# Altium PCB VFD_Clock.PcbDoc (part 1 of 2)
Units mil, origin at the board's own origin, x right, y up, seen from the top; angles counter-clockwise.
Board outline 9810.03 x 3515.03 mil, 2 copper layers (Top Layer, Bottom Layer); 86 components, 150 nets, 539 pads, 317 vias.
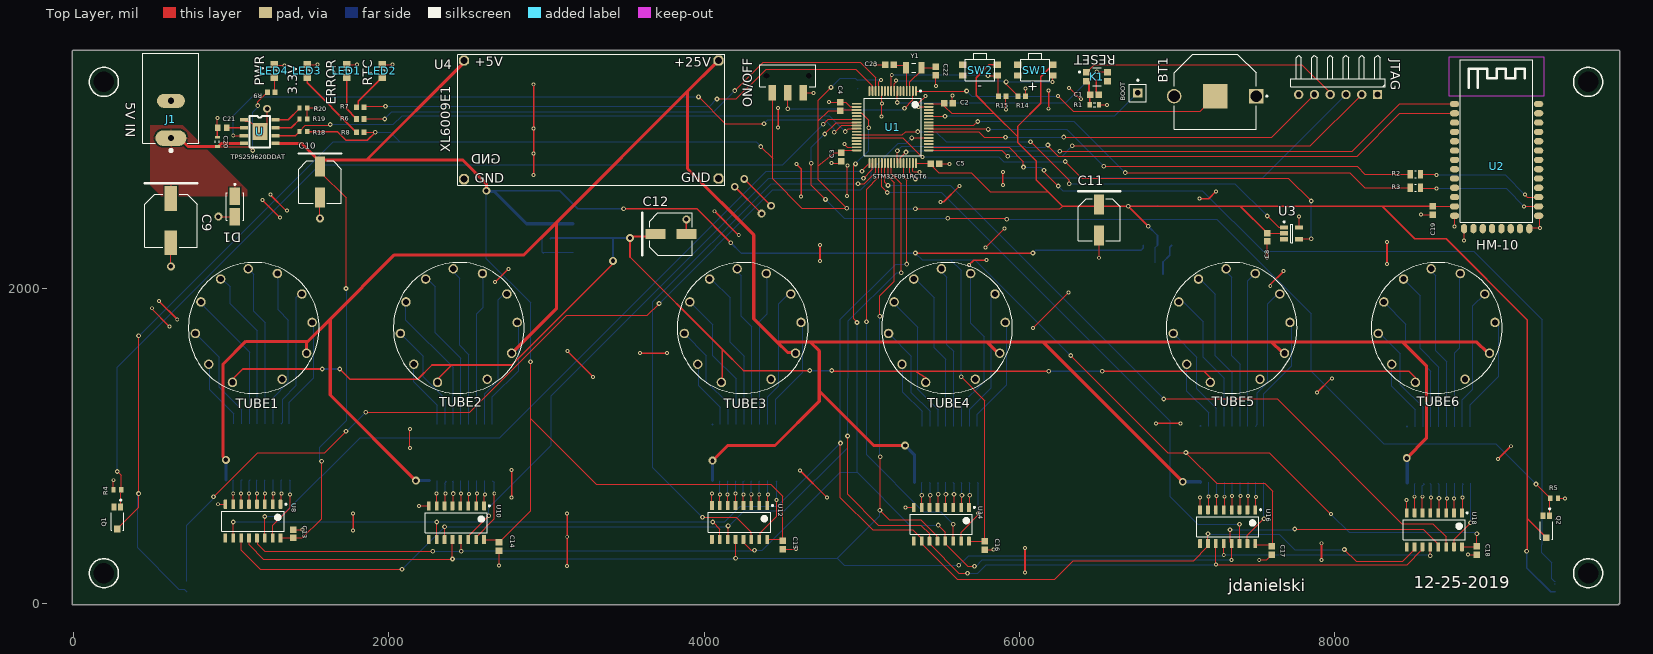
[diagram p0: Top Layer view]
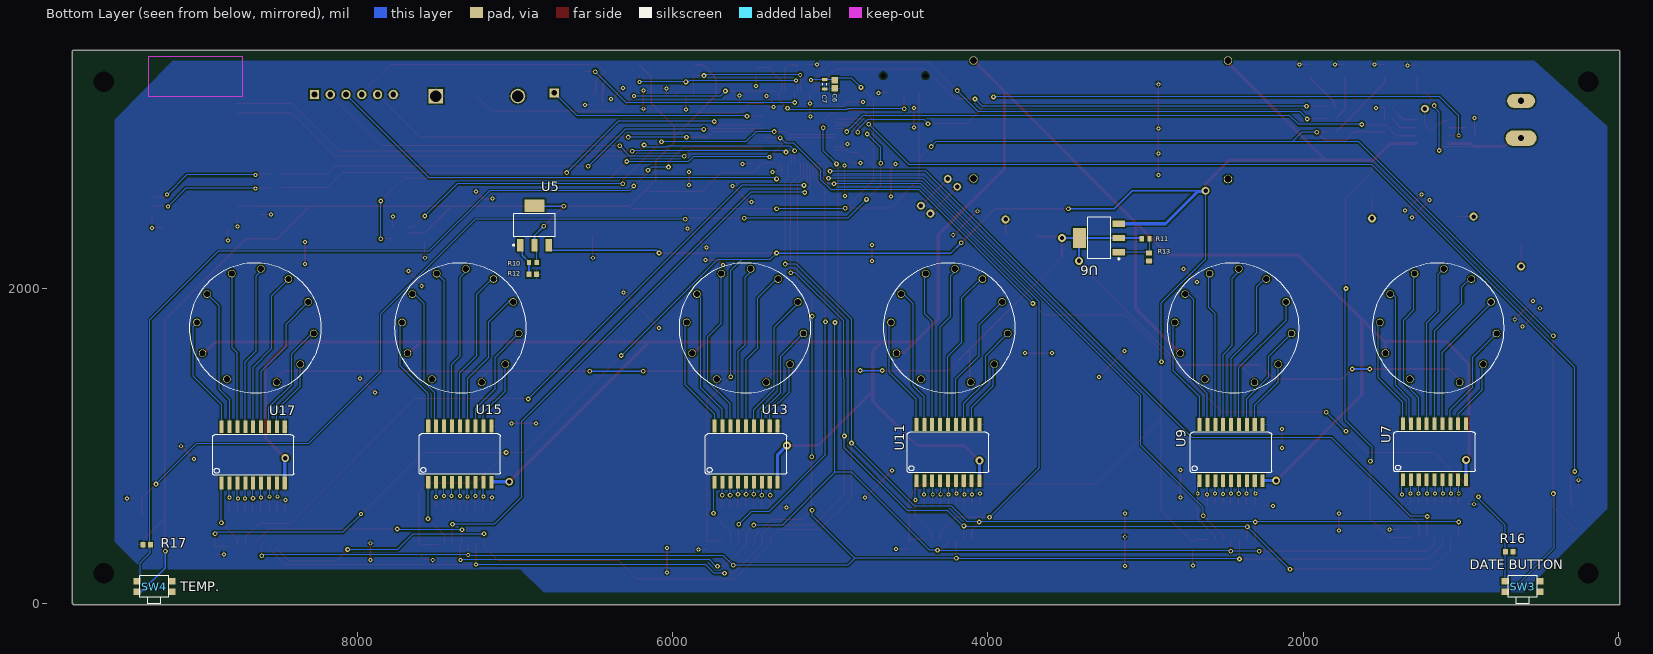
[diagram p1: Bottom Layer view, seen from below]

## Layer stack, top to bottom
Top Solder: solder mask 0.4, Solder Resist, Dk 3.5
Top Layer: signal copper 1.4
Dielectric 1: dielectric 12.6, FR-4, Dk 4.8
Bottom Layer: signal copper 1.4
Bottom Solder: solder mask 0.4, Solder Resist, Dk 3.5

## Board outline
0,-5.01 cw(c0,0) -5.01,0 -5.01,3505 cw(c0,3505) 0,3510.01 9800,3510.01 cw(c9800,3505) 9805.01,3505 9805.02,5 cw(c9800,5) 9800.02,-0.02 cw(c9795,0) 9795,-5.01

## Design rules (kind name [scope] priority, off if disabled: settings)
Clearance [All] p1: gap=10 ignorepadtopadclearanceinfootprint=TRUE except(0: Arc-Hole Track-Hole SMDPad-Hole THPad-Hole Via-Hole Fill-Hole Poly-Hole Region-Hole Text-Hole)
ComponentClearance [All] p1 off: gap=6 collisioncheckmode=3 verticalgap=10 showdistances=TRUE
HoleSize [All] p1: absolutevalues=TRUE maxlimit=1350 minlimit=1 maxpercent=80.000 minpercent=20.000
PolygonConnect [All] p1: connectstyle=Relief reliefconductorwidth=10 reliefentries=4 polygonreliefangle="90 Angle" airgapwidth=10
RoutingVias [All] p1: holewidth=28 width=50 viastyle="Through Hole" minholewidth=28 minwidth=50 maxholewidth=28 maxwidth=50
SilkToSilkClearance [All] p1 off: silktosilkclearance=10
SilkToSolderMaskClearance [IsPad] p1 off: minsilkscreentomaskgap=10 clearancetoexposedcopper=TRUE
SolderMaskExpansion [All] p1: expansion=4
Width [All] p1 off: maxlimit=10 minlimit=10 preferedwidth=10
26 further rules are at their usual default settings.

## Classes and differential pairs
component class Tubes4-6: C16 C17 C18 TUBE4 TUBE5 TUBE6 U13 U14 U15 U16 U17 U18
component class "Tubes 1-3": C13 C14 C15 TUBE1 TUBE2 TUBE3 U7 U8 U9 U10 U11 U12
component class Power: C9 C10 C11 C12 C20 C21 D1 J1 LED4 R9 R10 R11 R12 R13 R18 R19 R20 U U4 U5 U6
component class MCU: BOOT BT1 C1 C2 C3 C4 C5 C6 C7 C22 C23 JTAG K1 ON/OFF R1 R14 R15 R16 R17 SW1 SW2 SW3 SW4 U1 Y1
component class BLE_Sensors_LEDs: C8 C19 LED1 LED2 LED3 Q1 Q2 R2 R3 R4 R5 R6 R7 R8 U2 U3

## Components (designator, comment, footprint, x,y, rotation, side; value= is the part's Value field where it differs from the comment)
BOOT "Socket" PIN1 6750,3240 r0 top
BT1 "3001" KSTN-3001_V 7240,3220 r180 top
C1 "0.1uF" CAPC1608X90X40ML10T20 6475,3230 r180 top
C2 "100nF" CAPC1608X90X40ML10T20 5550,3175 r180 top
C3 "100nF" CAPC1608X90X40ML10T20 4870,2835 r90 top
C4 "100nF" CAPC1608X90X40ML10T20 4865,3155 r270 top
C5 "100nF" CAPC1608X90X40ML10T20 5465,2790 r180 top
C6 "10nF" CAPC1608X90X40ML10T20 4970,3295 r270 bottom
C7 "1uF" CAPC1608X90X20LL10 5035,3295 r90 bottom
C8 "0.1uF" CAPC1608X90X40ML10T20 7570,2325 r90 top
C9 "220uF" PNSC-FP-V-F_V 620,2430 r270 top
C10 "47uF" PNSC-FP-V-D_V 1565,2675 r270 top
C11 "47uF" PNSC-FP-V-D_V 6505,2435.39 r270 top
C12 "47uF" PNSC-FP-V-D_V 3790,2345.39 r0 top
C13 "0.1uF" CAPC1608X90X40ML10T20 1395,445 r270 top
C14 "0.1uF" CAPC1608X90X40ML10T20 2700,365 r90 top
C15 "0.1uF" CAPC1608X90X40ML10T20 4500,375 r90 top
C16 "0.1uF" CAPC1608X90X40ML10T20 5780,371.57 r90 top
C17 "0.1uF" CAPC1608X90X40ML10T20 7600,340 r90 top
C18 "0.1uF" CAPC1608X90X40ML10T20 8900,340 r90 top
C19 "0.1uF" CAPC1608X90X40ML10T20 8620,2495 r90 top
C20 "1uF" CAPC1608X90X20LL10 915,2930 r270 top
C21 "47nF" CAPC1608X90X35ML10T15 945,3020 r0 top
C22 "6pF" CAPC1608X90X40ML10T20 5470,3380 r90 top
C23 "6pF" CAPC1608X90X40ML10T20 5176.57,3420 r0 top
D1 "SMAJ5.0A-E3/61" VISH-DO-214AC-2_M 1025,2520 r270 top
J1 "5V IN" *CUI_PJ-037A 620,2953.78 r90 top
JTAG "Header 6H" HDR1X6H 8270,3230 r180 top
K1 "RESET" PNSC-EVPAA_V 6490.94,3343.54 r0 top
LED1 "ERROR" 0805_A 1735,3380 r270 top
LED2 "RTC" 0805_A 1960,3380 r270 top
LED3 "3.3V" 0805_A 1485,3380 r270 top
LED4 "PWR" 0805_A 1275,3380 r270 top
ON/OFF "JS102011SAQN" CKCP-JS102011SAQN-3_V 4530,3295 r180 top
Q1 "Left" VSIL-TEMT6000X01_V 280,545 r270 top
Q2 "Right" VSIL-TEMT6000X01_V 9340,490 r270 top
R1 "" J1-0603 6475,3165 r0 top value=10k
R2 "0" RESC2013X50X30LL20T20 8510,2725 r180 top
R3 "0" RESC2013X50X30LL20T20 8510,2640 r180 top
R4 "10k" RESC1608X55X30LL15T15 280,725 r0 top
R5 "10k" RESC1608X55X30LL15T15 9390,670 r180 top
R6 "1k" RESC1608X55X30LL20T20 1820,3075 r0 top
R7 "1k" RESC1608X55X30LL20T20 1820,3150 r0 top
R8 "1k" RESC1608X55X30LL20T20 1820,2990 r0 top
R9 "1k" RESC1608X55X30LL20T20 1255,3245 r180 top
R10 "300" RESC1608X55X30LL15T15 6885,2165 r180 bottom
R11 "10k" RESC1608X55X30LL15T15 3000,2315.39 r0 bottom
R12 "560" RESC1608X55X30LL20T20 6885,2090 r0 bottom
R13 "1.8k" RESC1609X50X30NL10T20 2980,2200 r270 bottom
R14 "10k" RESC1608X55X30LL20T20 6015,3220 r180 top
R15 "10k" RESC1608X55X30LL20T20 5890,3220 r180 top
R16 "10k" RESC1608X55X30LL20T20 695,330 r0 bottom
R17 "10k" RESC1608X55X30LL20T20 9334.06,376.46 r180 bottom
R18 "1K" RESC1608X55X30LL15T15 1460,2995 r0 top
R19 "464R" RESC1608X55X30LL15T15 1460,3075 r180 top
R20 "400K" RESC1608X55X30LL15T15 1460,3145 r180 top
SW1 "+" 434331045822 6100,3385 r180 top
SW2 "-" 434331045822 5750,3385 r180 top
SW3 "DATE BUTTON" 434331045822 610,110.77 r180 bottom
SW4 "TEMP." 434331045822 9285,110.77 r180 bottom
TUBE1 "VFD-IV-11" VFD-IV11 1145,1750 r0 top
TUBE2 "VFD-IV-11" VFD-IV11 2445,1750 r0 top
TUBE3 "VFD-IV-11" VFD-IV11 4245,1750 r0 top
TUBE4 "VFD-IV-11" VFD-IV11 5540,1750 r0 top
TUBE5 "VFD-IV-11" VFD-IV11 7345,1750 r0 top
TUBE6 "VFD-IV-11" VFD-IV11 8645,1750 r0 top
U "TPS259620DDAT" "TPS259620DDAT - duplicate" 1082.64,3069.8 r0 top
U1 "STM32F091RCT6" STM-LQFP64_L 5196.17,3023.83 r270 top
U2 "HM-10" HM-10 9025,2920 r0 top
U3 "TMP35" ADI-RJ-5_M 7725,2350 r0 top
U4 "XL6009E1" XL6009E1 3230,3055.39 r0 top
U5 "TLV1117LV33DCYR" DCY0004A_M 6875,2400 r90 bottom
U6 "TLV1117LV33DCYR" DCY0004A_M 3295,2320.39 r0 bottom
U7 "TBD62783AFG" TBD62783AFG 1215,965 r180 bottom
U8 "SN74HC595DR" D0016A_N 1140,525 r270 top
U9 "TBD62783AFG" TBD62783AFG 2505,960 r180 bottom
U10 "SN74HC595DR" D0016A_N 2430,515 r270 top
U11 "TBD62783AFG" TBD62783AFG 4300,960 r180 bottom
U12 "SN74HC595DR" D0016A_N 4225,517.28 r270 top
U13 "TBD62783AFG" TBD62783AFG 5580,950 r180 bottom
U14 "SN74HC595DR" D0016A_N 5505,505 r270 top
U15 "TBD62783AFG" TBD62783AFG 7395,950 r180 bottom
U16 "SN74HC595DR" D0016A_N 7320,490 r270 top
U17 "TBD62783AFG" TBD62783AFG 8705,945 r180 bottom
U18 "SN74HC595DR" D0016A_N 8630,470 r270 top
Y1 "ABS07-120-32.768KHZ-T" ABRA-ABS07_A_V 5330,3400 r180 top

## Footprints (in the part's own frame and the unit in brackets; to place one, negate y for a bottom-side part, rotate by r counter-clockwise, add the part's x,y. Pads: shape width x height; smd on the part's side, far side on the other; paste and mask are expansions set on the pad)
0805_A [mm] "Chip LED, 2-Leads, Body 2.0x1.3mm, IPC Medium Density"
  rect 1.1x1.2 smd: 1(-1.05,0) 2(1.05,0)
  silkscreen extent -0.15,-0.5 0.15,0.5, body extent -1,-0.62 1,0.63, height 0.68
434331045822 [mm] "4.7*3.5mm side push type,SMD, height 1.65mm, black actuator, 220gf, T&R"
  rect 1.2x1 smd: 1(2.8,0.85) 2(2.8,-0.85) 3(-2.8,0.85) 4(-2.8,-0.85)
  silkscreen extent -2.35,-2.75 2.35,1.75, body extent -3.2,-2.75 3.2,1.75, height 1.65
*CUI_PJ-037A [mm]
  oval 2.5x5 hole 1: 1(0,0)
  oval 2.25x4.5 hole 1: 2(6,0)
  silkscreen extent -2.2,-4.5 13.7,4.5
ABRA-ABS07_A_V [mm] "SMD, 2-Leads, Body 3.2x1.5mm"
  rect 1x1.8 smd: 1(-1.25,0) 2(1.25,0)
  silkscreen extent -0.35,-0.75 0.35,0.75, body extent -1.6,-0.75 1.6,0.75, height 0.9
ADI-RJ-5_M [mm] "SOT-23, 5-Leads, Body 2.9x1.6mm, Pitch 0.95mm, IPC Low Density"
  rect 1.3x0.7 smd: 1(-1.2,0.95) 2(-1.2,0) 3(-1.2,-0.95) 4(1.2,-0.95) 5(1.2,0.95)
  silkscreen extent -1.32,-1.5 0.15,1.97, body extent -0.85,-1.5 0.85,1.5, height 1.45
CAPC1608X90X20LL10 [mm] "Chip Capacitor, 2-Leads, Body 1.70x0.90mm, IPC High Density"
  rect 0.45x0.85 smd: 1(-0.75,0) 2(0.75,0)
  silkscreen extent -0.15,-0.33 0.15,0.33, body extent -0.85,-0.45 0.85,0.45, height 0.9
CAPC1608X90X35ML10T15 [mm] "Chip Capacitor, 2-Leads, Body 1.60x0.80mm, IPC Low Density"
  rect 0.95x1.05 smd: 1(-0.725,0) 2(0.725,0)
  body extent -0.85,-0.45 0.85,0.45, height 0.9
CAPC1608X90X40ML10T20 [mm] "Chip Capacitor, 2-Leads, Body 1.7x0.9mm, IPC Low Density"
  rect 1.05x1.05 smd: 1(-0.675,0) 2(0.675,0)
  body extent -0.85,-0.45 0.85,0.45, height 0.9
CKCP-JS102011SAQN-3_V [mm] "SMD, 3-Leads, Body 9x3.6mm, Pitch 2.5mm"
  rect 1.2x2.5 smd: 1(-2.5,1.375) 2(0,1.375) 3(2.5,1.375)
  round 0.6 hole 0.9 unplated: MH1(-3.4,-1.375) MH2(3.4,-1.375)
  silkscreen extent -4.5,-3.17 4.5,0.43, body extent -4.5,-5.18 4.5,2.37, height 3.52
D0016A_N [mm] "SOIC, 16-Leads, Body 10x4mm, Pitch 1.27mm, IPC Medium Density"
  rrect17% 1.45x0.6 smd: 1(-2.725,4.445) 2(-2.725,3.175) 3(-2.725,1.905) 4(-2.725,0.635) 5(-2.725,-0.635) 6(-2.725,-1.905) 7(-2.725,-3.175) 8(-2.725,-4.445) 9(2.725,-4.445) 10(2.725,-3.175) 11(2.725,-1.905) 12(2.725,-0.635) 13(2.725,0.635) 14(2.725,1.905) 15(2.725,3.175) 16(2.725,4.445)
  silkscreen extent -2.85,-5 1.6,5.42, body extent -3,-4.95 3,4.95, height 1.59
DCY0004A_M [mm] "SOT223, 4-Leads, Body 6.7x3.7mm, Pitch 2.3mm, IPC Low Density"
  rrect10% 2.05x1 smd: 1(-3.175,2.3) 2(-3.175,0) 3(-3.175,-2.3)
  rrect5% 2.05x3.25 smd: 4(3.175,0)
  silkscreen extent -3.3,-3.35 1.85,3.48, body extent -3.5,-3.25 3.5,3.25, height 1.62
HDR1X6H [mm] "Connector; Header; 6 Position; Right Angle"
  rect 1.5x1.5 hole 0.9: 1(0,0)
  round 1.5 hole 0.9: 2(2.54,0) 3(5.08,0) 4(7.62,0) 5(10.16,0) 6(12.7,0)
  silkscreen extent -1.27,-6.35 13.97,-1.27
HM-10 [mm]
  rrect99% 1.5x1 smd: 1(-6.77,6.35) 2(-6.77,4.85) 3(-6.77,3.35) 4(-6.77,1.85) 5(-6.77,0.35) 6(-6.77,-1.15) 7(-6.77,-2.65) 8(-6.77,-4.15) 9(-6.77,-5.65) 10(-6.77,-7.15) 11(-6.77,-8.65) 12(-6.77,-10.15) 13(-6.77,-11.65) 22(6.77,-11.65) 23(6.77,-10.15) 24(6.77,-8.65) 25(6.77,-7.15) 26(6.77,-5.65) 27(6.77,-4.15) 28(6.77,-2.65) 29(6.77,-1.15) 30(6.77,0.35) 31(6.77,1.85) 32(6.77,3.35) 33(6.77,4.85) 34(6.77,6.35)
  rrect99% 1x1.5 smd: 14(-5.23,-13.72) 15(-3.73,-13.72) 16(-2.23,-13.72) 17(-0.73,-13.72) 18(0.77,-13.72) 19(2.27,-13.72) 20(3.77,-13.72) 21(5.27,-13.72)
  Top Layer keep-out region: -7.62,7.62 -7.62,13.97 7.62,13.97 7.62,7.62
  Bottom Layer keep-out region: -7.62,7.62 -7.62,13.97 7.62,13.97 7.62,7.62
  silkscreen extent -5.84,-12.7 5.84,13.45
J1-0603 [mm] "Chip Resistor, Body 1.6x0.8mm, IPC High Density"
  rect 0.7x0.9 smd: 1(-0.75,0) 2(0.75,0)
  silkscreen extent -0.2,-0.35 0.2,0.35, body extent -0.85,-0.48 0.85,0.48, height 0.9
KSTN-3001_V [mm] "THD, 2-Leads, Body 13.21x12.07mm"
  rect 2.35x2.35 hole 1.85: 1(-6.605,0)
  round 2.35 hole 1.85: 2(6.605,0)
  rect 3.96x3.96 smd: 3(0,0)
  silkscreen extent -8.45,-6.73 6.61,5.34, body extent -6.61,-6.73 6.61,5.34, height 3
PIN1 [mm] "Connector; Plug"
  rect 1.5x1.5 hole 0.9: 1(0,0)
  silkscreen extent -1.4,-1.4 1.4,2.17
PNSC-EVPAA_V [mm] "SMD, 4-Leads, Body 2.9x3.5mm, Pitch 1.45mm"
  rect 1.15x1.05 smd: 1(-1.675,0.725) 2(-1.675,-0.725) 3(1.675,0.725) 4(1.675,-0.725)
  silkscreen extent -2.92,-1.45 0.7,1.45, body extent -1.75,-1.45 1.75,1.45, height 1.9
PNSC-FP-V-D_V [mm] "CAPAE, 2-Leads, Body 6.80x6.80mm"
  rect 3.2x1.6 smd: 1(-2.5,0) 2(2.5,0)
  silkscreen extent -4.6,-3.4 3.4,3.4, body extent -3.9,-3.4 3.9,3.4, height 6.1
PNSC-FP-V-F_V [mm] "CAPAE, 2-Leads, Body 8.50x8.50mm"
  rect 4x2 smd: 1(-3.55,0) 2(3.55,0)
  silkscreen extent -6.05,-4.25 4.25,4.25, body extent -5,-4.25 5,4.25, height 10.5
RESC1608X55X30LL15T15 [mm] "Chip Resistor, 2-Leads, Body 1.60x0.80mm, IPC High Density"
  rect 0.7x0.85 smd: 1(-0.625,0) 2(0.625,0)
  body extent -0.87,-0.48 0.87,0.48, height 0.55
RESC1608X55X30LL20T20 [mm] "Chip Resistor, 2-Leads, Body 1.60x0.80mm, IPC High Density"
  rect 0.8x0.9 smd: 1(-0.6,0) 2(0.6,0)
  body extent -0.9,-0.5 0.9,0.5, height 0.55
RESC1609X50X30NL10T20 [mm] "Chip Resistor, 2-Leads, Body 1.55x0.85mm, IPC Medium Density"
  rect 0.8x0.95 smd: 1(-0.625,0) 2(0.625,0)
  body extent -0.82,-0.48 0.82,0.48, height 0.5
RESC2013X50X30LL20T20 [mm] "Chip Resistor, 2-Leads, Body 2.00x1.25mm, IPC High Density"
  rect 0.85x1.35 smd: 1(-0.825,0) 2(0.825,0)
  silkscreen extent -0.1,-0.58 0.1,0.58, body extent -1.1,-0.72 1.1,0.72, height 0.5
STM-LQFP64_L [mm] "QFP, 64-Leads, Body 10x10mm, Pitch 0.5mm, IPC High Density"
  oval 1.6x0.3 smd: 1(-5.8,3.75) 2(-5.8,3.25) 3(-5.8,2.75) 4(-5.8,2.25) 5(-5.8,1.75) 6(-5.8,1.25) 7(-5.8,0.75) 8(-5.8,0.25) 9(-5.8,-0.25) 10(-5.8,-0.75) 11(-5.8,-1.25) 12(-5.8,-1.75) 13(-5.8,-2.25) 14(-5.8,-2.75) 15(-5.8,-3.25) 16(-5.8,-3.75) 33(5.8,-3.75) 34(5.8,-3.25) 35(5.8,-2.75) 36(5.8,-2.25) 37(5.8,-1.75) 38(5.8,-1.25) 39(5.8,-0.75) 40(5.8,-0.25) 41(5.8,0.25) 42(5.8,0.75) 43(5.8,1.25) 44(5.8,1.75) 45(5.8,2.25) 46(5.8,2.75) 47(5.8,3.25) 48(5.8,3.75)
  oval 0.3x1.6 smd: 17(-3.75,-5.8) 18(-3.25,-5.8) 19(-2.75,-5.8) 20(-2.25,-5.8) 21(-1.75,-5.8) 22(-1.25,-5.8) 23(-0.75,-5.8) 24(-0.25,-5.8) 25(0.25,-5.8) 26(0.75,-5.8) 27(1.25,-5.8) 28(1.75,-5.8) 29(2.25,-5.8) 30(2.75,-5.8) 31(3.25,-5.8) 32(3.75,-5.8) 49(3.75,5.8) 50(3.25,5.8) 51(2.75,5.8) 52(2.25,5.8) 53(1.75,5.8) 54(1.25,5.8) 55(0.75,5.8) 56(0.25,5.8) 57(-0.25,5.8) 58(-0.75,5.8) 59(-1.25,5.8) 60(-1.75,5.8) 61(-2.25,5.8) 62(-2.75,5.8) 63(-3.25,5.8) 64(-3.75,5.8)
  silkscreen extent -5.92,-4.6 4.6,4.6, body extent -5,-5 5,5, height 1.6
TBD62783AFG [mil]
  rect 26x80 smd: GND(246.46,178.15) I1(-153.54,-178.15) I2(-103.35,-178.15) I3(-53.54,-178.15) I4(-3.54,-178.15) I5(46.46,-178.15) I6(96.46,-178.15) I7(146.46,-178.15) I8(196.46,-178.15) O1(-153.54,178.15) O2(-103.54,178.15) O3(-53.54,178.15) O4(-3.54,178.15) O5(46.46,178.15) O6(96.46,178.15) O7(146.46,178.15) O8(196.46,178.15) VCC(246.46,-178.15)
  silkscreen extent -211,-128 304,128
"TPS259620DDAT - duplicate" [mm]
  rect 1.3x0.55 smd: 1(0,0) 2(0,-1.27) 4(0,-3.81) 5(5.1,-3.81) 6(5.1,-2.54) 7(5.1,-1.27) 8(5.1,0)
  rect 1.4x0.55 smd: 3(0,-2.54)
  rect 2.4x2.7 smd: 9(2.6,-1.9)
  silkscreen extent 0.9,-4.44 4.2,0.64
VFD-IV11 [mil]
  round 60 / inner round 60 / far side round 47.56 hole 40: 1(180,-325) 2(335,-160) 3(370,35) 4(305,215) 5(150,345) 6(-35,375) 7(-210,310) 8(-335,165) 9(-370,-35) 10(-285,-230) 11(-135,-345)
  silkscreen extent -415,-415 415,415
VISH-DO-214AC-2_M [mm] "DO-214AC, 2-Leads, Body 4.5x2.79mm, IPC Low Density"
  rect 2.8x1.7 smd: 1(-1.625,0) 2(1.625,0)
  silkscreen extent -3.7,-1.4 2.25,1.4, body extent -2.25,-1.39 2.25,1.4, height 2.29
VSIL-TEMT6000X01_V [mm] "SMD, 3-Leads, Body 4x2mm"
  rect 1.1x0.8 smd: 1(-1.775,0.55) 2(-1.775,-0.55)
  rect 1.1x1 smd: 3(1.775,0)
  silkscreen extent -3,-1 2,1, body extent -2,-1 2,1, height 1.05
XL6009E1 [mil]
  oct 65x65 / inner oct 60x60 / far side oct 50x50 hole 45: P$1(-751.97,389.76) P$2(862.2,389.76) P$3(862.2,-358.27) P$4(-751.97,-362.2)
  silkscreen extent -791,-400 902,430

## Part data
BT1: library part CMP-2000-05463-1, "Holder Battery Coin, 12 mm, 2-Pin THD, RoHS", Manufacturer=Keystone, Package Description="2-Pin Through Hole Device, Body 13.21 x 12.07 mm", Datasheet URL=https://datasheet.ciiva.com/3/3001-3954.pdf, Datasheet Version="Rev. H, 09/2006", Manufacturer URL=http://www.keyelco.com/, Mounting Technology=ThroughHole, Package Reference=3001
C1 C2 C3 C4 C5 C8 C13 C14 C15 C16 C17 C18 C19 C22 C23: library part CMP-2000-05002-1, "Ceramic Multilayer Capacitor, 100 nF, +/- 10%, 50 V, -55 to 155 degC, 0603 (1608 Metric), RoHS, Tape and Reel", Capacitance=0.1µF, Manufacturer=Yageo, Operating Temperature=-55degC~125degC, Package / Case=0603(1608Metric), Package Description="2-Pin Surface Mount Device, Body 1.6 x 0.8 mm", Package Reference=603, Ratings=-, Standard Package=1, Temperature Coefficient=X7R, Tolerance=±10%, Voltage - Rated=16V, Applications=GeneralPurpose, Category=Capacitors, Datasheet URL=https://datasheet.ciiva.com/11786/0900766b80d84f1d-11786077.pdf, Datasheet Version="Rev. 2, 05/2009", Family=CeramicCapacitors, Featured Product=CommodityMultilayerCeramicCapacitors–CCSeries, Features=-, Height - Seated (Max)=-, Lead Spacing=-, Lead Style=-, Manufacturer URL=http://www.yageo.com/, Mounting Type=SurfaceMount,MLCC, Online Catalog=CCSeries, Other Names=311-1088-6, Packaging=Digi-Reel, Product Training Modules=MultilayerCeramicCapacitors, Series=CC, Size / Dimension="0.063\"Lx0.031\"W(1.60mmx0.80mm)", Thickness (Max)="0.035\"(0.90mm)"
C6: library part CMP-2100-03600-1, "Chip Capacitor, 10 nF, +/- 10%, 50 V, -55 to 125 degC, 0603 (1608 Metric), RoHS, Tape and Reel", Case/Package=0603, Case Code (Metric)=1608, Dielectric=X7R, Insulation Resistance=100GR, Manufacturer=Yageo, Max Operating Temperature=125degC, Min Operating Temperature=-55degC, Package Description="2-Pin Surface Mount Device, Body 1.6 x 0.8 mm", Package Quantity=1, Tolerance=10%, Voltage=50V, Capacitance=10nF, Case Code (Imperial)=0603, Composition=Ceramic, Datasheet URL=http://www.yageo.com/documents/recent/UPY-GPHC_X7R_6.3V-to-50V_15.pdf, Datasheet Version="Rev. 15, 10/2016", Depth=0.8mm, Height=0.8mm, Lead Free=LeadFree, Length=1.6mm, Manufacturer URL=http://www.yageo.com/, Material=Ceramic, Mount=SurfaceMount, Number of Pins=2, Package Reference=0603, Packaging=TapeandReel, Radiation Hardening=No, REACH SVHC=NoSVHC, RoHSCompliant=True, Termination=SMD/SMT, Thickness=0.035inch, Voltage Rating=50V, Voltage Rating (DC)=50V, Width=0.031inch
C7 C20: library part CMP-2000-06025-1, "Chip Capacitor, 1 uF, +/- 10%, 50 V, -55 to 85 degC, 0603 (1608 Metric), RoHS, Tape and Reel", Capacitance=1µF, Manufacturer=TDK, Operating Temperature=-55°C~85°C, Package / Case=0603(1608Metric), Package Description="2-Pin Surface Mount Device, Body 1.6 x 0.8 mm", Package Reference=0603, PCN Part Number=MLCCPartNumberChange30/Nov/2012, Ratings=-, Standard Package=1, Temperature Coefficient=X5R, Tolerance=±10%, Voltage - Rated=50V, Applications=GeneralPurpose, Category=Capacitors, Datasheet URL=https://product.tdk.com/info/en/catalog/datasheets/mlcc_commercial_general_en.pdf, Datasheet Version=08/2016, Design Resources=20WNon-IsolatedBuckLEDDriverUsingPLLNK460KG, Family=CeramicCapacitors, Features=-, Height - Seated (Max)=-, Lead Spacing=-, Lead Style=-, Manufacturer URL=http://www.tdk.com/, Mounting Technology=SurfaceMount, Mounting Type=SurfaceMount,MLCC, Online Catalog=CSeries,GeneralPurpose, Other Names=445-7468-6, Packaging=Digi-Reel®, Product Training Modules=CSeriesGeneralApplicationsSEAT,CCV,andTVCLDesignToolsGuidetoReplacinganElectrolyticCapacitorwithanMLCC, RoHS Information=RoHSCertificate-MLCC, Series=C, Size / Dimension="0.063\"Lx0.031\"W(1.60mmx0.80mm)", Thickness (Max)="0.035\"(0.90mm)"
C9: library part CMP-2000-06215-1, "Aluminum Electrolytic Capacitor, 220 uF, +/- 20%, 35 V, 2-Pin SMD (Size Code F), -55 to 105 degC, RoHS, Tape and Reel", AE Capacitor Case=RadialCan-SMD, Capacitance=220µF, Capacitance Tolerance=±20%, Leakage Current=7.7µA, Life Time @ Temperature=2000hours@105°C, Manufacturer=Panasonic, Operating Temperature Max=105°C, Operating Temperature Min=-55°C, Operating Temperature Range=-55°Cto+105°C, Package Description="2-Pin Electrolytic Aluminum Capacitor, Body 8.3 x 8.3 mm", Package Reference=FP-V-F, Ripple Current AC=850mA, Voltage Rating=35V, Capacitance Tolerance ±=±20%, Capacitor Case Style=RadialCan-SMD, Datasheet URL=http://industrial.panasonic.com/cdbs/www-data/pdf/RDE0000/ABA0000C1184.pdf, Datasheet Version=03/2016, Diameter=8mm, ESR=0.08ohm, External Length / Height=10.2mm, Height=10.2mm, Lifetime @ Temperature=2000hours@105°C, Manufacturer URL=http://www.panasonic.com/, Mounting Technology=SurfaceMount, Package URL=http://industrial.panasonic.com/cdbs/www-data/pdf/RDE0000/DME0000COL48.pdf, Packaging=CutTape, Product Range=PANASONIC-FPSeries, Series=FP, SVHC=ToBeAdvised
C10 C11 C12: library part CMP-2000-06216-1, "Aluminum Electrolytic Capacitor, 47 uF, +/- 20%, 35 V, 2-Pin SMD (Size Code D), -55 to 105 degC, RoHS, Tape and Reel", Capacitance=47µF, Case Size/Dimension=Ø6.3x5.8mm, ESR (Equivalent Series Resistance)=0.26O, Lifetime@Temperature=2000Hrs@105°C, Manufacturer=Panasonic, Operating Temp-Max=105°C, Operating Temp Range=-55to+105°C, Package Description="2-Pin Electrolytic Aluminum Capacitor, Body 6.6 x 6.6 mm", Package Reference=FP-V-D, Rated Voltage=35V, Ripple Current=300mA, Datasheet URL=http://industrial.panasonic.com/cdbs/www-data/pdf/RDE0000/ABA0000C1184.pdf, Datasheet Version=03/2016, Manufacturer URL=http://www.panasonic.com/, Mounting Technology=SurfaceMount, Package URL=http://industrial.panasonic.com/cdbs/www-data/pdf/RDE0000/DME0000COL48.pdf, Series=FP, Type=Can
C21: library part CMP-2006-02927-1, Manufacturer=Murata, Part Number=GRM188R71H473KA61D
D1: library part CMP-0548-00235-2, "Transient Voltage Suppressor, 6.40 to 231 V, 5 V Stand-off Voltage, Uni-Directional, -55 to 155 degC, 2-pin DO-214AC, Pb-Free, Tape and Reel", Manufacturer="Vishay Semiconductor", Operating Junction and Storage Temperature Range="-55 to 150 degC", ComponentLink1Description="Manufacturer URL", ComponentLink1URL=http://www.vishay.com/, ComponentLink2Description=Datasheet, ComponentLink2URL=http://www.vishay.com/docs/88390/smaj50a.pdf, ComponentLink3Description="Package Specification", ComponentLink3URL=http://www.vishay.com/docs/88390/smaj50a.pdf, DatasheetVersion=12/8/2013, ID (uA)=800, IFSM="40 A", Mounting Technology="Surface Mount", PackageDescription="2-Pin DO-214AC (SMA), Body 4.245 x 2.665 mm", PackageReference=DO-214AC-2, Packing="Tape and Reel", PartNumber=SMAJ5.0A-E3/61, PPPM (W)="400, 300", RoHS=TRUE, VBR Uni-Directional (V)="6.4 to 231", VWM (V)=5
J1: library part PJ-037A
JTAG: "Header, 6-Pin, Right Angle", LatestRevisionDate=17-Jul-2002, LatestRevisionNote="Re-released for DXP Platform.", Publisher="Altium Limited"
K1: library part CMP-2000-06231-1, "Light Touch Switch, 100 mOhm, -40 to 85 degC, 4-Pin SMD, RoHS, Tape and Reel", Actuator Color=Black, Contact Rating @ Voltage=0.02@15VDCA, Dielectric Strength=250VAC, Manufacturer=Panasonic, Maximum AC Voltage Rating=N/A, Maximum Contact Resistance=100mOhm, Maximum DC Voltage Rating=15V, Minimum Insulation Resistance=100MOhm, Operating Force=1N, Operating Temperature=-40to85C, Package Description="4-Pin Surface Mount Device, Body 2.9 x 3.5 mm, Pitch 1.45 mm", Package Reference=EVPAA, Part No=EVP-AA002K, Actuator Length=0.3mm, Actuator Style=RectangularButton, Base Material=N/A, Body Orientation=Straight, Contact Material=N/A, Contact Plating=N/A, COO=JP, Datasheet URL=https://industrial.panasonic.com/cdbs/www-data/pdf/ATV0000/ATV0000C1.pdf, Datasheet Version=04/2016, Dimension=4.3x2.9x1.7mm, ECCN=EAR99, Electrical Life=1000000Cycles, Family=EVPAA, Ground Terminal=No, Housing Material=N/A, HTS=8507204000, Illumination Type=N/R, Manufacturer URL=http://www.panasonic.com/, Mechanical Life=N/A, Mounting=SurfaceMount,J-Bend, Mounting Technology=SurfaceMount, Packaging=EmbossedTapeandReel, Pole Throw Configuration=SPST, Product Weight=N/A, RoHS=Yes, Seal Description=N/A, Seal Location=N/A, Supplier=PanasonicIndustrialDevices, Supplier Standard Pack=5,000, Switch Configuration=N.O., Type=LightTouch
LED1 LED2 LED3 LED4: library part CMP-1426-00010-1, "SMD mono-color Chip LED, WL-SMCW, Super Red", Color="Super Red", Manufacturer="Wuerth Elektronik", PartNumber=150080SS75000, ComponentLink1Description="Manufacturer URL", ComponentLink1URL=http://www.we-online.com, ComponentLink2Description=Datasheet, ComponentLink2URL=http://katalog.we-online.com/led/datasheet/150080SS75000.pdf, PackageReference=0805_A
ON/OFF: library part CMP-2000-06501-1, "Sub-Miniature Slide Switch, SPDT, -40 to 85 degC, 3-Pin SMD, RoHS, Tape and Reel", Actuator Color=Black, Contact Rating @ Voltage=0.3@6VDCA, Dielectric Strength=500VAC, Manufacturer="C&K Components", Maximum AC Voltage Rating=N/A, Maximum Contact Resistance=70mOhm, Maximum DC Voltage Rating=6V, Minimum Insulation Resistance=100MOhm, Operating Temperature=-40to85C, Package Description="3-Pin Surface Mount Device, Body 9 x 3.6 mm, Height 3.5 mm", Package Reference=SMT, Actuator Material=Nylon4/6, Actuator Style=SideSlide, Base Material=N/A, Body Orientation=RightAngle, Contact Material=CopperAlloy, Contact Plating=Silver, COO=US, Datasheet URL=https://datasheet.ciiva.com/1532/js-9dec14-1532400.pdf, Datasheet Version=12/2014, Dimension=9x4.3mm, ECCN=EAR99, Electrical Life=15000Cycles, Family=JS, Housing Material=Nylon4/6, HTS=8536509050, Manufacturer URL=http://www.ckswitches.com/, Mechanical Life=N/A, Mounting=SurfaceMount,GullWing, Mounting Technology=SurfaceMount, Packaging=TapeandReel, Part No=JS102011SAQN, Pole Throw Configuration=SPDT, Product Weight=N/A, RoHS=Yes, Seal Description=N/A, Seal Location=N/A, Supplier=C&KComponents, Switch Configuration=N/A, Type=Sub-Miniature
Q1 Q2: library part CMP-1666-00035-1, "Ambient Light Sensor / , 100 mW, -40 to 100 degC, 3-Pin SMD, RoHS, Tape and Reel", Case\Package=0603, Case Code (Metric)=1608, Colour=Red, Forward Current="20 mA", Forward Voltage="2 V", Max Operating Temperature="85 degC", Min Operating Temperature="-55 degC", Package Quantity=3000, Power Rating="75 mW", Case Code (Imperial)=0603, ComponentLink1Description="Manufacturer URL", ComponentLink1URL=http://www.vishay.com/, ComponentLink2Description=Datasheet, ComponentLink2URL=http://www.vishay.com/docs/81579/temt6000.pdf, DatasheetVersion="Rev. 1.9, 08/2011", Height="0.8 mm", Illumination Colour=Red, Length="1.6 mm", Lens Style=Diffused, Luminous Intensity="54 mcd", Mount="Surface Mount", Nominal Vf="2 V", PackageDescription="3-Pin Surface Mount Device, Body 4 x 2 mm", PackageReference=1206, Packaging="Tape and Reel", Pins=2, Radiation Hardening=No, RoHSCompliant=true, Viewing Angle="130 degrees", Width="0.8 mm"
R1: library part Res3, "Resistor", LatestRevisionDate=29-May-2009, LatestRevisionNote="IPC-7351 Footprint Added.", PackageDescription="Chip Resistor", PackageReference=J1-0603, Published=8-Jun-2000, Publisher="Altium Limited"
R2 R3: library part CMP-2001-04896-1, Manufacturer="Vishay Dale", Part Number=CRCW08050000Z0EA
R4 R5: library part CMP-2000-00181-1, Manufacturer=Panasonic, Part Number=ERJ-3EKF1002V
R6 R7 R8 R9 R14 R15 R16 R17: library part CMP-2000-00873-1, Manufacturer=Panasonic, Part Number=ERA3AEB102V
R10 R11 R18 R19 R20: library part CMP-2000-00411-1, Manufacturer=Panasonic, Part Number=ERJ-3EKF3000V
R12: library part CMP-2000-00091-1, Manufacturer=Panasonic, Part Number=ERA3AEB561V
R13: library part CMP-2000-03824-1, Manufacturer="Vishay Dale", Part Number=CRCW0603100RFKEA
SW1 SW2 SW3 SW4: library part CMP-1461-00001-1, "WS-TASU SMD Tact Switch 4.7X3.5 mm side push", Manufacturer="Wuerth Elektronik", PartNumber=434331045822, ComponentLink1Description="Manufacturer URL", ComponentLink1URL=http://www.we-online.com, ComponentLink2Description=Datasheet, ComponentLink2URL=http://katalog.we-online.de/em/datasheet/434331045822.pdf, NoPins=04, PackageReference=434331045822
TUBE1 TUBE2 TUBE3 TUBE4 TUBE5 TUBE6: Package=VFD-IV11, DeviceSetName=VFD-IV-11, GateName_1=G$1, LibraryName=VFD-Clock, SymbolName_1=VFD-IV11
U: library part TI_TPS259620DDAT, "Texas Instruments TPS259620DDAT", ComponentLink1Description="TI Link", ComponentLink1URL=http://www.ti.com/product/TPS2596
U1: library part CMP-0304-00199-2, "ARM Cortex-M0 32-bit MCU, 256 KB Flash, 32 KB Internal RAM, 52 I/Os, 64-Pin LQFP, -40 to 85 degC, Tray", I/Os (High Current)=52, Manufacturer=STMicroelectronics, Operating Frequency(F) (Processor speed) (MHz)=48, Package Description="64-Pin Low-profile Quad Flat Package, Body 10 x 10 mm, Pitch 0.5 mm", Package Reference=LQFP64, Supply Voltage(Vcc) min (V)=2, ComponentLink1Description="Manufacturer URL", ComponentLink1URL=http://www.st.com/, ComponentLink2Description=Datasheet, ComponentLink2URL=http://www.st.com/st-web-ui/static/active/en/resource/technical/document/datasheet/DM00115237.pdf, Core="ARM Cortex-M0", D/A Converter=1, DatasheetVersion="Rev. 2", FLASH Size (Prog) (kB)=256, Internal RAM Size (kB)=32, Mounting Technology="Surface Mount", Packing=Tray, PartNumber=STM32F091RCT6
U3: library part CMP-0887-00046-1, "Voltage Output Temperature Sensor, 2.7 to 5.5 V Supply, Industrial, 5-pin SOT23 (RJ-5), Reel", Manufacturer="Analog Devices", PartNumber=TMP35GRTZ-REEL7, Supply Voltage Range="2.7 to 5.5 V", Code_JEDEC=MO-178-AA, ComponentLink1Description="Manufacturer URL", ComponentLink1URL=http://www.analog.com/en/index.html, ComponentLink2Description=Datasheet, ComponentLink2URL=http://www.analog.com/static/imported-files/data_sheets/TMP35_36_37.pdf, ComponentLink3Description="Package Specification", ComponentLink3URL=http://www.analog.com/static/imported-files/packages/PKG_PDF/SOT-23(RJ)/RJ_5.pdf, ComponentLink4Description="Product URL", ComponentLink4URL=http://www.analog.com/en/mems-sensors/digital-temperature-sensors/tmp35/products/product.html, DatasheetVersion="Rev. F", Mounting Technology="Surface Mount", PackageDescription="5-Pin Small Outline Transistor Package, Body 2.9 x 1.6 mm, Pitch 0.95 mm", PackageReference=RJ-5, PackageVersion="121608-A , 12/2008", Packing=Reel
U5 U6: library part CMP-0395-00503-2, "Single Output LDO, 1 A, Fixed 3.3 V Output, 2 to 5.5 V Input, 4-pin SOT-223 (DCY), -40 to 125 degC, Green (RoHS & no Sb/Br)", Manufacturer="Texas Instruments", Accuracy(%)=2, Code_JEDEC=TO-261, ComponentLink1Description="Manufacturer URL", ComponentLink1URL=http://www.ti.com/, ComponentLink2Description=Datasheet, ComponentLink2URL=http://www.ti.com/general/docs/lit/getliterature.tsp?genericPartNumber=TLV1117LV33&fileType=pdf, ComponentLink3Description="Package Specification", ComponentLink3URL=http://www.ti.com/litv/pdf/mpds094a, DatasheetVersion=SBVS160A, Eco-Plan="Green (RoHS & no Sb/Br)", Fixed Output Options(V)=3.3, Iout(Max)(A)=1, Iq(Typ)(mA)=0.05, Mounting Technology="Surface Mount", PackageDescription="4-Pin Plastic Small Outline, Body 3.5 x 6.5 mm, Pitch 2.3 mm", PackageReference=DCY0004A, PackageVersion=4202506/B, PartNumber=TLV1117LV33DCYR, SubFamily="Single Channel LDO", Vdo(Typ)(mV)=1200, Vin(Max)(V)=5.5, Vin(Min)(V)=2, Vout Adj(Max)(V)=3.3, Vout Adj(Min)(V)=3.3
U7: "TUBE1", DeviceSetName=TBD62783AFG, GateName_1=G$1, LibraryName=TBD62783AFG, Package=TBD62783AFG, SymbolName_1=TBD62783AFG
U8 U10 U12 U14 U16 U18: library part CMP-0780-00037-3, "8-Bit Shift Registers With 3-State Output Registers, D0016A, LARGE T&R", F @ Nom Voltage(Max)(Mhz)=28, Generic Part Number=SN74HC595, ICC @ Nom Voltage(Max)(mA)=0.08, Manufacturer="Texas Instruments", Operating Temperature Range(C)="-40 to 85", Rating=Military, tpd @ Nom Voltage(Max)(ns)=34, Voltage(Nom)(V)=6, 3-State Output=Yes, Bits=4, Code_JEDEC="MS-012 variation AC", DatasheetVersion=SCLS041H, Input Type=CMOS, Output Drive (IOL/IOH)(Max)(mA)=7.8/-7.8, Output Type=CMOS, PackageReference=D0016A, PackageVersion=http://www.ti.com/lit/ml/mpds178g/mpds178g.pdf, Technology Family=HC, VCC(Max)(V)=6, VCC(Min)(V)=2
U9: "TUBE2", DeviceSetName=TBD62783AFG, GateName_1=G$1, LibraryName=TBD62783AFG, Package=TBD62783AFG, SymbolName_1=TBD62783AFG
U11: "TUBE3", DeviceSetName=TBD62783AFG, GateName_1=G$1, LibraryName=TBD62783AFG, Package=TBD62783AFG, SymbolName_1=TBD62783AFG
U13: "TUBE4", DeviceSetName=TBD62783AFG, GateName_1=G$1, LibraryName=TBD62783AFG, Package=TBD62783AFG, SymbolName_1=TBD62783AFG
U15: "TUBE5", DeviceSetName=TBD62783AFG, GateName_1=G$1, LibraryName=TBD62783AFG, Package=TBD62783AFG, SymbolName_1=TBD62783AFG
U17: "TUBE6", DeviceSetName=TBD62783AFG, GateName_1=G$1, LibraryName=TBD62783AFG, Package=TBD62783AFG, SymbolName_1=TBD62783AFG
Y1: library part CMP-2000-07587-1, "Tuning Fork Crystal, 32.768 KHz, +/- 20 ppm, -40 to 85 degC, 2-Pin SMD, RoHS, Tape and Reel", Case\/Package=SMD/SMT, ESR (Equivalent Series Resistance)=55KOhm, Frequency=32.768KHz, Frequency Tolerance=20ppm, Load Capacitance=6pF, Manufacturer=Abracon, Max Operating Temperature=85degC, Min Operating Temperature=-40degC, Package Description="2-Pin Surface Mount Device, Body 3.2 x 1.5 mm", Package Quantity=3000, Package Reference=ABS07, Series Resistance=60KOhm, Datasheet URL=http://www.abracon.com/Resonators/ABS07-120-32.768kHz-T.pdf, Datasheet Version=11/2014, Depth=1.5mm, Height=0.035inch, Lead Free=LeadFree, Length=3.2mm, Manufacturer URL=http://www.abracon.com/, Mount=SurfaceMount, Mounting Technology=SurfaceMount, Number of Pins=2, Packaging=TapeandReel, Radiation Hardening=No, REACH SVHC=NoSVHC, RoHSCompliant=True, Termination=SMD/SMT, Tolerance=20ppm, Width=0.061inch
BOOT: LatestRevisionDate=17-Jul-2002, LatestRevisionNote="Re-released for DXP Platform.", Publisher="Altium Limited"
U2: DeviceSetName=HM-10, GateName_1=G$1, LibraryName=HM-10_BLE, Package=HM-10, SymbolName_1=HM-10
U4: DeviceSetName=XL6009E1, GateName_1=G$1, LibraryName=VFD-Clock, Package=XL6009E1, SymbolName_1=XL6009E1

## Free pads (board coordinates)
  round 60 hole 130: 1(195,195) 1(195,3310) 1(9605,195.01) 1(9605,3309.99)

## Via types
v1: diameter 25, hole 13, Top Layer to Bottom Layer, 162 vias
v2: diameter 30, hole 15, Top Layer to Bottom Layer, 136 vias
v3: diameter 50, hole 28, Top Layer to Bottom Layer, 18 vias
v4: diameter 25, hole 15, Top Layer to Bottom Layer, 1 vias

## Nets (pads, with @x,y where several pads share a name; then routed paths per layer and width w, separated by ;. In a path a pad name is that pad's centre, name@x,y a point inside that pad or via, vN(x,y) a via of type N, cw(c..) or ccw(c..) an arc to the next point about the centre after c; other vN are vias at no path point)
+1V65V: C12.1 R11.2 TUBE1.11 TUBE2.11 TUBE3.11 TUBE4.11 TUBE5.11 TUBE6.11 U6.2 U6.4 | length 9482.3
  Top Layer w10: TUBE1.11@1015,1430 1075,1490 v2(1580,1490) ; v2(1690,1490) 1755,1425 2185,1425 2275,1515 2400,1515 ; TUBE2.11@2315,1430 2400,1515 ; v3(3422.54,2175) 3422.54,2157.54 2780,1515 2400,1515 ; v3(3530.39,2320.39) 3530.39,2199.61 4115,1615 ; TUBE3.11@4115,1430 4115,1615 ; v2(4670,1480) 4250,1480 4115,1615 ; v2(4810,1480) 4815,1475 5340,1475 ; TUBE4.11@5410,1430 5340,1475 ; v2(6185,1475) 5340,1475 ; v2(6525,1475) 7170,1475 ; TUBE5.11@7215,1430 7170,1475 ; TUBE6.11@8515,1430 8470,1475 7170,1475
  Top Layer w12: v3(3530.39,2320.39) 3540.68,2320.39 3550.28,2330 3676.18,2330 C12.1@3691.57,2345.39
  Bottom Layer w10: v2(1580,1490) v2(1690,1490) ; R11.2@3024.61,2315.39 3029.61,2320.39 U6.2@3170,2320.39 U6.4@3420,2320.39 3422.54,2317.85 v3(3422.54,2175) ; v2(4670,1480) v2(4810,1480) ; v2(6185,1475) v2(6525,1475)
  Bottom Layer w12: U6.4@3420,2320.39 v3(3530.39,2320.39)
+5V: C10.1 C13.2 C14.2 C15.2 C16.2 C17.2 C18.2 U4.P$1 U5.3 U6.3 U8.16 U10.16 U12.16 U14.16 U16.16 U18.16 U.5 | length 22343.6
  Top Layer w6: U8.16@1315,417.72 1315.71,418.43 C13.2@1395,418.43 1454.02,418.43 1575,539.41 v2(1575,905) ; C10.1@1565,2773.43 1565,2741.93 1730,2576.93 v2(1730,2000) ; U10.16@2605,407.72 2683.86,407.72 C14.2@2700,391.57 2900,591.57 2900,1175 ; v2(2900,1535) 2900,1175 ; U12.16@4400,410 4491.57,410 C15.2@4500,401.57 4500,681.49 4421.49,760 3315,760 2900,1175 ; v2(5630,1440) 5780,1290 C16.2@5780,398.15 5680.43,398.15 U14.16@5680,397.72 ; v2(6325,1575) 6940,960 v2(7055,960) ; U16.16@7485,375.43 7591.14,375.43 C17.2@7600,366.57 7605,371.57 7605,715 7555,765 7250,765 v2(7055,960) ; v1(7975,570) 7585,960 v2(7055,960) ; U18.16@8805,362.72 8896.14,362.72 C18.2@8900,366.57 v2(8900,445)
  Top Layer w10: v2(3490,2505) 3955,2505 v2(4170,2290) ; v2(5340,2225) v2(6085,2225)
  Top Layer w20: U.5@1283.43,2919.8 1450.12,2919.8 1565,2804.92 1575.08,2815 1859.61,2815 ; U4.P$1@2480,3435.39 1859.61,2815 ; v3(2620,2620) 2620,2665 2470,2815 1859.61,2815
  Bottom Layer w6: v2(1575,905) 1565,915 1565,995 1735,1165 1735,1995 v2(1730,2000) ; v3(2620,2620) 2620,2190 2900,1910 v2(2900,1535) ; v2(5340,2225) 5382,2183 5562,2183 ; v2(5630,1440) 5630,2115 5562,2183 ; v2(6325,1575) 5717,2183 5562,2183 ; v1(7975,570) 8090,455 8890,455 v2(8900,445)
  Bottom Layer w10: v3(2620,2620) 3085,2620 3200,2505 v2(3490,2505) ; v2(4170,2290) 4235,2225 v2(5340,2225) ; v2(6085,2225) 6101.61,2241.61 6769.76,2241.61 6784.45,2256.3 U5.3@6784.45,2275
  Bottom Layer w20: v3(2620,2620) 2625.74,2614.26 2670.62,2614.26 2677.44,2607.44 2873.94,2410.94 U6.3@3170,2410.94
+25V: TUBE1.2 TUBE2.2 TUBE3.2 TUBE4.2 TUBE5.2 TUBE6.2 U4.P$2 U7.VCC U9.VCC U11.VCC U13.VCC U15.VCC U17.VCC | length 18386.8
  Top Layer w20: v3(968.54,913.54) 950,932.08 950,1520 1095,1665 1488.74,1665 ; TUBE1.2@1465,1595 1480,1610 1480,1656.26 1484.37,1660.63 1488.74,1665 ; v3(2173.15,781.85) 1630,1325 1630,1806.26 ; TUBE2.2@2780,1590 3065,1875 3065,2420 ; 3895,3250.39 U4.P$2@4080,3435.39 ; v3(4053.54,908.54) 4150,1005 4450,1005 4730,1285 4730,1350 ; TUBE3.2@4565,1595 4528.74,1595 4463.74,1660 ; v3(5275,1005) 5075,1005 4730,1350 ; TUBE4.2@5875,1590 5865,1590 5795,1660 ; v3(7035,775) 6150,1660 ; TUBE5.2@7665,1595 7600,1660 ; v3(8455,925) 8580,1050 8580,1510 8430,1660 ; TUBE6.2@8965,1595 8900,1660 8430,1660 ; 1488.74,1665 1630,1806.26 ; 1630,1806.26 2036.87,2213.13 2858.13,2213.13 3065,2420 ; 3065,2420 3895,3250 3895,2760 4315,2340 4315,1808.74 4463.74,1660 ; 4463.74,1660 4675,1660 ; 4675,1660 5795,1660 ; 4675,1660 4730,1605 4730,1350 ; 5795,1660 6150,1660 ; 6150,1660 7600,1660 ; 7600,1660 8430,1660
  Bottom Layer w20: U7.VCC@968.54,786.85 v3(968.54,913.54) ; v3(2173.15,781.85) U9.VCC@2258.54,781.85 ; U11.VCC@4053.54,781.85 v3(4053.54,908.54) ; v3(5275,1005) 5333.54,946.46 U13.VCC@5333.54,771.85 ; v3(7035,775) 7145.54,775 7148.54,772 U15.VCC@7148.54,771.85 ; v3(8455,925) 8458.54,921.46 U17.VCC@8458.54,766.85
BOOT0: BOOT.1 U1.60 | length 1387.2
  Top Layer w6: U1.60@5424.52,3092.73 v2(5527.27,3092.73)
  Bottom Layer w6: v2@5526.1,3093.9 6603.9,3093.9 BOOT.1@6750,3240
GND: BT1.1 BT1.2 C2.1 C3.1 C4.1 C5.1 C6.2 C7.1 C8.1 C9.2 C10.2 C11.2 C12.2 C13.1 C14.1 C15.1 C16.1 C17.1 C18.1 C19.1 C20.1 C21.1 C22.1 C23.1 D1.2 J1.2 JTAG.6 LED1.1 LED2.1 LED3.1 LED4.1 ON/OFF.1 R1.2 R4.1 R5.1 R12.1 R13.2 R14.1 R15.1 R16.1 R17.1 R19.1 R20.1 TUBE1.1 TUBE2.1 TUBE3.1 TUBE4.1 TUBE5.1 TUBE6.1 U1.12 U1.18 U1.31 U1.47 U1.63 U2.13 U2.14 U2.21 U2.22 U3.5 U4.P$3 U4.P$4 U7.GND U8.8 U9.GND U10.8 U11.GND U12.8 U13.GND U14.8 U15.GND U16.8 U17.GND U18.8 U.1 U.9 | length 10353.6
  Top Layer w6: R4.1@255.39,725 v1(255.39,784.61) ; v3(620,2140) C9.2@620,2290.24 ; C21.1@915,3021.46 v1(915,3080) ; v1(917.28,632.28) U8.8@965,632.28 ; v3(921.02,2456.02) D1.2@1025,2456.02 ; U.1@1082.64,3069.8 1090.46,3061.98 1118.02,3061.98 1134.85,3045.15 1140.76,3045.15 1185,3000.91 U.9@1185,2995 1229.24,3039.24 1229.24,3139.24 v3(1230,3140) ; LED4.1@1275,3421.34 1281.34,3415 v1(1340,3415) ; C13.1@1395,471.57 v1(1453.43,471.57) ; R19.1@1484.61,3075 R20.1@1484.61,3145 v1(1540,3145) ; LED3.1@1485,3421.34 1486.34,3420 v1(1550,3420) ; v3(1565,2445) C10.2@1565,2576.57 ; LED1.1@1735,3421.34 1736.34,3420 v1(1800,3420) ; LED2.1@1960,3421.34 1961.34,3420 v1(2025,3420) ; v1(2135,990) v1(2135,1110) ; v1(2192.28,622.28) U10.8@2255,622.28 ; v1(2700,245) C14.1@2700,338.43 ; U12.8@4050,624.57 v1(4050,700) ; C15.1@4500,348.43 v1(4583.43,348.43) ; ON/OFF.1@4628.43,3240.87 v1(4694.13,3240.87) ; v1(4791.57,3181.57) C4.1@4865,3181.57 4898.43,3181.57 4927.44,3152.56 4967.04,3152.56 U1.18@4967.82,3151.78 ; v1(4808.46,2795.7) 4857.28,2795.7 C3.1@4870,2808.43 ; v1(4890,2915) 4909.12,2895.88 U1.31@4967.82,2895.88 ; v1(4906.88,2586.88) 4907.5,2587.5 4907.5,2777.5 v1(4910,2780) ; v1(5085,3420) C23.1@5150,3420 ; v1(5125,3090) 5126.14,3091.14 5126.14,3171.14 v1(5127.27,3172.27) U1.12@5127.27,3252.18 ; v1(5277.72,612.28) U14.8@5330,612.28 ; U1.47@5324.12,2795.48 5324.12,2744.82 5328.94,2740 v1(5365,2740) ; v1(5359.52,3151.78) 5359.52,3174.52 v1(5405,3220) ; v1@5366.78,3151.78 U1.63@5424.52,3151.78 ; v1(5470,3285) C22.1@5470,3353.43 ; C5.1@5491.57,2790 v1(5555,2790) ; v1(5575,3225) 5575,3176.57 C2.1@5576.57,3175 ; C16.1@5780,345 v1(5835,345) ; v1(5913.62,3136.38) R15.1@5913.62,3220 ; R14.1@6038.62,3220 v1(6038.62,3268.62) ; v1(6315,3270) 6318.1,3270 6386.65,3201.45 v1(6389.75,3201.45) ; R1.2@6504.53,3165 v1(6555,3165) ; v1(6505,2195) C11.2@6505,2336.97 ; U16.8@7145,597.28 v1(7145,675) ; v1(7520,280) 7566.57,280 C17.1@7600,313.43 ; v1(7570,2195) C8.1@7570,2298.43 ; U3.5@7772.24,2387.4 v1(7772.24,2457.24) ; U18.8@8455,577.28 v1(8455,660) ; v1(8546.57,2468.43) C19.1@8620,2468.43 ; v1(8758.46,2393.46) U2.13@8758.46,2461.34 ; v1(8819.09,2305.91) U2.14@8819.09,2379.84 ; v1@8843.51,313.43 C18.1@8900,313.43 ; U2.21@9232.48,2379.84 9233.86,2378.46 9240.4,2385 v1(9300,2385) 9300,2452.88 U2.22@9291.54,2461.34 ; R5.1@9414.61,670 v1(9460,670)
  Top Layer w8: C20.1@915,2959.53 C21.1@915,3021.46
  Top Layer w10: v1(500,1875) 500,1870 v1(610,1760) ; v1(545,1920) v1(660,1805) ; v1(1200,2560) 1310,2450 v1(1312.5,2450) ; v1(1250,2595) 1350,2495 v1(1355,2495) ; v1(1775,465) v1(1775,575) ; v1(2675,2040) v1(2760,2125) ; v1(2780,675) v1(2780,850) v1@2785,855 ; v1(2920,2720) v1(2920,2855) v1(2920,3015) v1(2920,3295) ; v1(3130,240) 3132.5,242.5 v1(3132.5,426.25) 3132.5,572.5 v1(3130,575) ; v1(3135,1605) 3135,1602.5 3295,1442.5 v1(3295,1440) ; v1(3595,1590) v1(3765,1590) ; C12.2@3888.43,2345.39 v3(3888.43,2438.43) ; v1(4065,2490) 4067.5,2490 4217.5,2340 v1(4220,2340) ; v3(4195,2645) v3(4365,2475) ; v3(4255,2695) v3(4425,2525) ; v1(4470,3020) v1(4470,3145) ; v1(4585,2790) 4615,2760 v1(4615,2584.61) ; v1(4607.5,845) 4610,845 v1(4780,675) ; v1(4735,2175) v1(4735,2275) ; v1(5500,2550) 5520,2550 v1(5620,2650) ; v1(5680,2150) 5710,2180 v1(5790,2180) ; v1(5785,2260) v1(5905,2380) ; v1(5895,2655) v1(5895,2740) ; v1(6035,200) v1(6035,355) ; v1(6085,1750) v1(6310,1975) ; v1(6185,3140) v1(6185,3255) ; v1(6865,1145) v1(7020,1145) ; v1(7140,2570) 7200,2570 v1(7245,2615) ; v1(7590,2015) 7590,2025 v1(7675,2110) ; v1(7885,1340) 7975,1430 v1(7980,1430) ; v1(7915,280) v1(7915,385) ; v1(8330,2155) v1(8330,2295) ; v1(9035,920) v1(9115,1000)
  Bottom Layer w6: C6.2@4970,3268.43 C6.2@4972.95,3265.47 ; v1(5913.62,3136.38) v1@5916.38,3136.38 ; v1@8840,315 v1(8845,315)
  Bottom Layer w10: U11.GND@4051.69,1140 U11.GND@4053.54,1138.15 ; U15.GND@7146.69,1130 U15.GND@7148.54,1128.15 ; U17.GND@8456.69,1125 U17.GND@8458.54,1123.15